# Altium PCB PCB1.PcbDoc
Units mm, origin at the board's own origin, x right, y up, seen from the top; angles counter-clockwise.
Board outline 86 x 54.03 mm, 2 copper layers (Top Layer, Bottom Layer); 70 components, 64 nets, 250 pads, 287 vias.
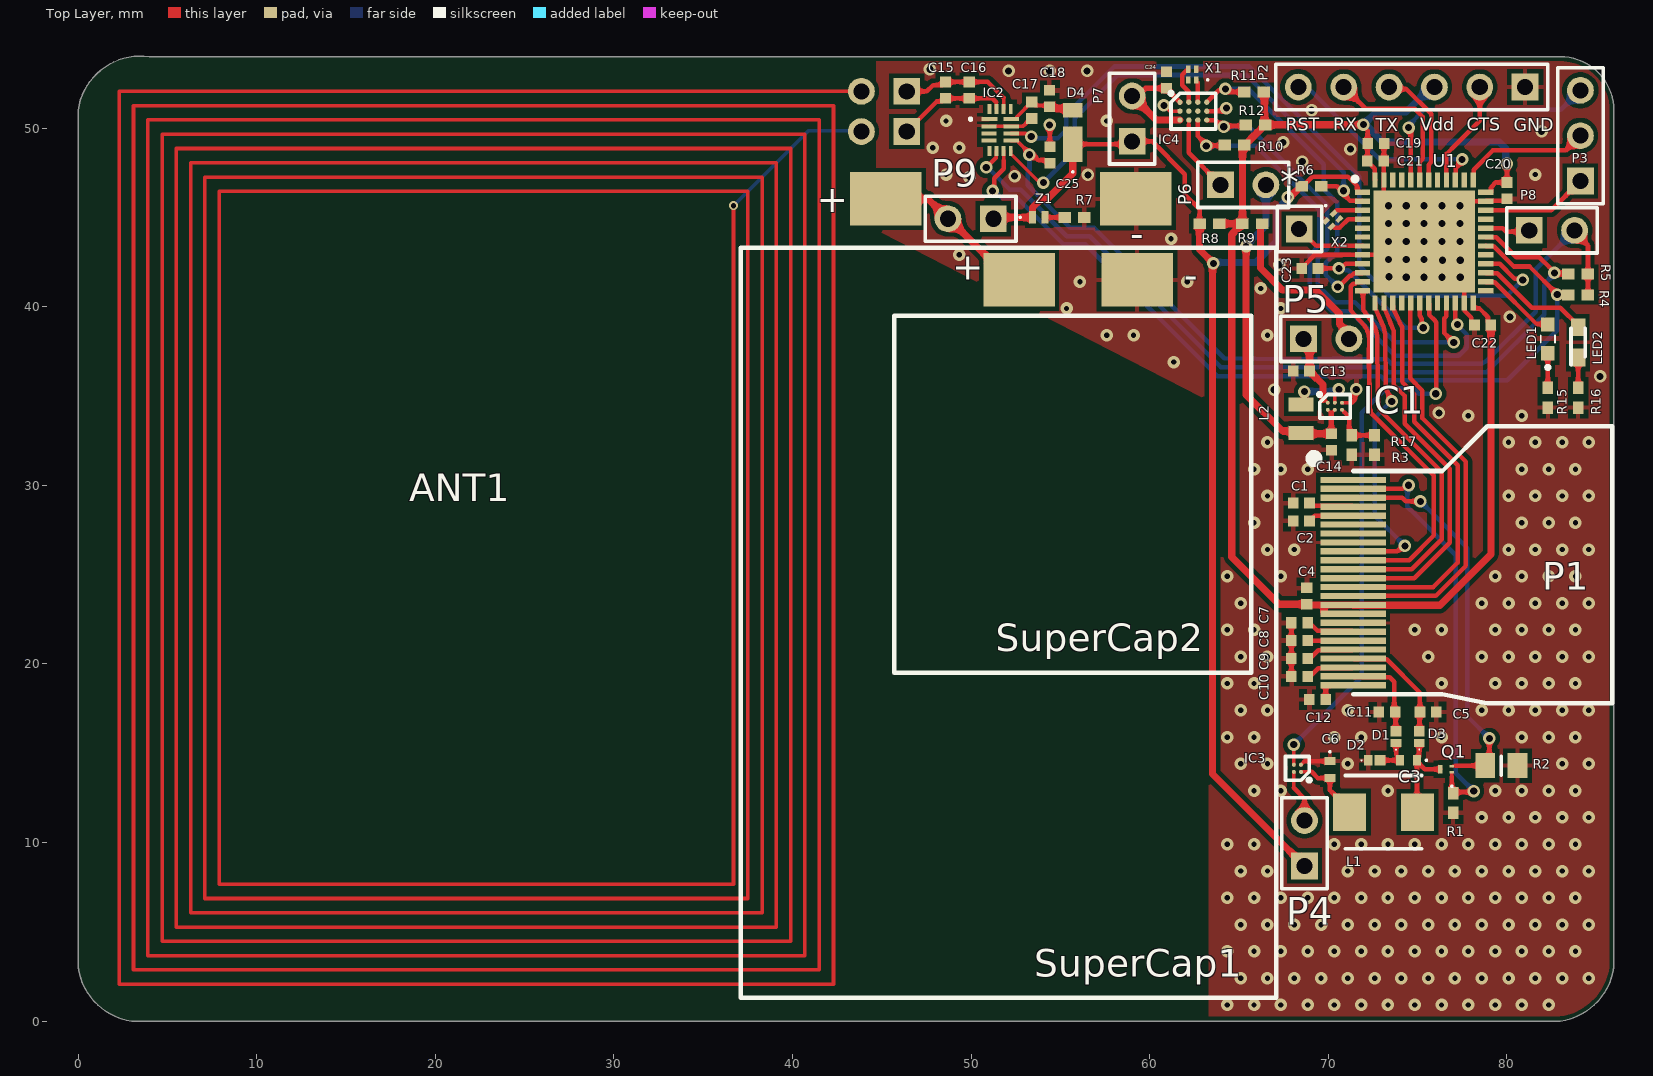
[diagram p0: Top Layer view]
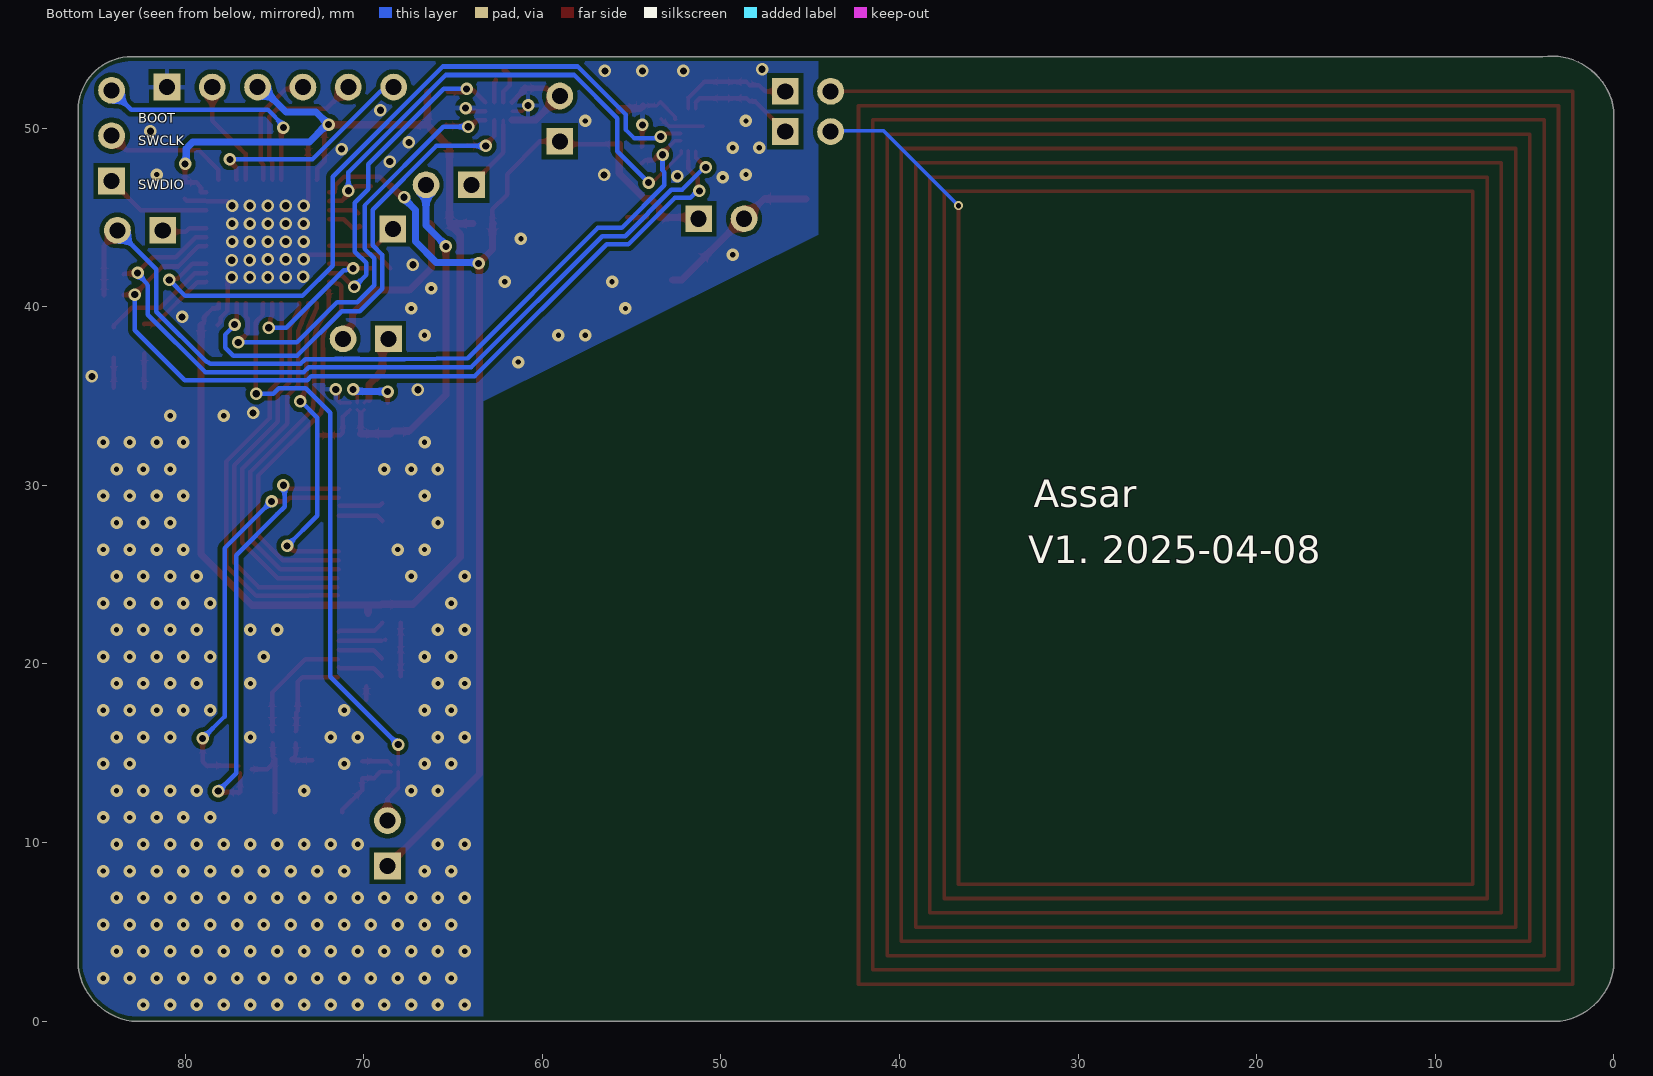
[diagram p1: Bottom Layer view, seen from below]

## Layer stack, top to bottom
Top Solder: solder mask 0.0102, Solder Resist, Dk 3.5
Top Layer: signal copper 0.0356
Dielectric 1: dielectric 0.32, FR-4, Dk 4.8
Bottom Layer: signal copper 0.0356
Bottom Solder: solder mask 0.0102, Solder Resist, Dk 3.5

## Board outline
0,3 ccw(c3.5,3.5) 3,0 83,0 ccw(c82.5,3.5) 86,3 86,51 ccw(c83,51) 83,54 4,54 ccw(c3.5,50.5) 0,51

## Design rules (kind name [scope] priority, off if disabled: settings)
BoardOutlineClearance [All] p1: gap=0.25 ignorepadtopadclearanceinfootprint=FALSE
Clearance "Stitching Vref-" [IsStitchingVia and InNet('Vref-') vs (IsVia and (Not IsStitchingVia)) Or IsPad] p1: gap=0.127 ignorepadtopadclearanceinfootprint=FALSE
Clearance [All] p2: gap=0.254 ignorepadtopadclearanceinfootprint=TRUE except(0: Arc-Hole Track-Hole SMDPad-Hole THPad-Hole Via-Hole Fill-Hole Poly-Hole Region-Hole Text-Hole; 0.1: Arc-SMDPad Track-SMDPad; 0.2: Arc-Arc Arc-Track Track-Track SMDPad-SMDPad)
ComponentClearance [All] p1: gap=0 collisioncheckmode=3 verticalgap=0 showdistances=FALSE
MinimumSolderMaskSliver [All] p1: minsoldermaskwidth=0.1
PolygonConnect [All] p1: connectstyle=Relief reliefconductorwidth=0.254 reliefentries=4 polygonreliefangle="90 Angle" airgapwidth=0.254
RoutingVias [All] p1: holewidth=0.711 width=1.27 viastyle="Through Hole" minholewidth=0.3 minwidth=0.6 maxholewidth=0.711 maxwidth=1.27
SilkToSolderMaskClearance [IsPad] p1: minsilkscreentomaskgap=0.15 clearancetoexposedcopper=TRUE
SolderMaskExpansion [All] p1: expansion=0.102 istentingtop=FALSE
Width [All] p1: maxlimit=5 minlimit=0.2 preferedwidth=0.254 minimp=50.000000 maximp=50.000000 favimp=50.000000
27 further rules are at their usual default settings.

## Classes and differential pairs
component class DisplayDrivare: C1 C2 C3 C4 C5 C6 C7 C8 C9 C10 C11 C12 C13 C14 C24 D1 D2 D3 IC1 IC3 IC4 L1 L2 P1 P4 P5 P6 P7 P9 Q1 R1 R2 R3 R10 R11 R12 R17 SuperCap1 SuperCap2 X1
component class DigitalBlad: ANT1 C15 C16 C17 C18 C19 C20 C21 C22 C23 C25 D4 IC2 LED1 LED2 P2 P3 P8 R4 R5 R6 R7 R8 R9 R15 R16 U1 X2 Z1

## Components (designator, comment, footprint, x,y, rotation, side; value= is the part's Value field where it differs from the comment)
* "testpointu desu" Testupoint 67.056,42.981 r0 top
ANT1 "NFC-antenna" Antenna1 2.1,1.86 r0 top locked
C1 "GRM155R61E105KA12D" CAPC1005X55N 68.5,29 r180 top value=1µF
C2 "GRM155R61E105KA12D" CAPC1005X55N 68.5,28 r180 top value=1µF
C3 "GRM155C61E475ME15J" GRM15x 74.5,14.6 r180 top value=4.7µF
C4 "GRM155R61E105KA12D" CAPC1005X55N 68.8,23.8 r90 top value=1µF
C5 "GRM155R61E105KA12D" CAPC1005X55N 75.6,17.3 r180 top value=1µF
C6 "GRM155C61E475ME15J" GRM15x 70.1,14.075 r270 top value=4.7µF
C7 "GRM155R61E105KA12D" CAPC1005X55N 68.4,22.3 r180 top value=1µF
C8 "GRM155R61E105KA12D" CAPC1005X55N 68.4,21.3 r180 top value=1µF
C9 "GRM155R61E105KA12D" CAPC1005X55N 68.4,20.3 r180 top value=1µF
C10 "GRM155R61E105KA12D" CAPC1005X55N 68.4,19.3 r180 top value=1µF
C11 "GRM155R61E105KA12D" CAPC1005X55N 73.3,17.3 r180 top value=1µF
C12 "GRM155R61E105KA12D" CAPC1005X55N 69.4,18 r180 top value=1µF
C13 "AMK105CBJ106MV-F" CAPC1005X70N 68.5,36.4 r0 top
C14 "AMK105CBJ106MV-F" CAPC1005X70N 70.175,32.425 r90 top
C15 "GRM155C81C474KE01D" CAPC1005X70N 48.575,52.125 r90 top value=0F
C16 "GRM155C81C474KE01D" CAPC1005X70N 49.9,52.125 r90 top value=0F
C17 "C0402C101KCGACAUTO" CAPC1005X70N 53.4,51 r90 top
C18 "C0402C101KCMBASJ105SB7474KFNA01GACAUTO" CAPC1005X70N 54.4,51.66 r270 top
C19 "C0402C475K8PACTU" CAPC1005X70N 72.675,49.15 r0 top
C20 "MLAST105SB5104KFNA01" CAPC1005X70N 80.025,46.5 r270 top
C21 "MLAST105SB5104KFNA01" CAPC1005X70N 72.65,48.15 r0 top
C22 "MLAST105SB5104KFNA01" CAPC1005X70N 78.65,38.975 r180 top
C23 "VJ0402Y103KXJAC31X" CAPC1005X70N 68.975,42.15 r180 top
C24 "MLAST105SB5104KFNA01" CAPC1005X70N 60.95,52.69 r90 top
C25 "GRM155R61E105KA12D" CAPC1005X55N 54.425,48.5 r90 top value=1µF
D1 "NSR05F30NXT5G" NSR05F30NXT5G 73.8,15.9 r90 top
D2 "NSR05F30NXT5G" NSR05F30NXT5G 72.567,14.6 r0 top
D3 "NSR05F30NXT5G" NSR05F30NXT5G 75.1,15.9 r90 top
D4 "RBE01VYM6AFHTR" RBE01VYM6AFHTR 55.7,49.75 r0 top
IC1 "MAX17220ENT+T" BGA6C40P3X2_142X89X50 70.375,34.425 r0 top
IC2 "NTP53321G0JHKZ" NTP53321G0JHKZ 51.625,49.9 r0 top
IC3 "TPS22916CYFPR" BGA4C40P2X2_78X78X50 68.275,14.15 r180 top
IC4 "MAX31334EWC+T" BGA12C50P4X3_197X147X69 62.45,50.95 r0 top
L1 "SRP0408F-100M" INDPM4341X80N 73.1,11.7 r0 top
L2 "74479774222" WE-PMI_080562 68.475,33.725 r90 top
LED1 "150060RS55040" 150060RS55040 82.3,38.2 r90 top
LED2 "150060VS55040" LEDM168X50N 84,38 r90 top
P1 "FPC24(0.5MM)" "FPC24 (0.5mm)" 71.4,18.8 r0 top locked
P2 "FTDI" HDR1X6 81.03,52.3 r180 top
P3 "Header 3" HDR1X3 84.125,47.035 r90 top
P4 "Header 2" HDR1X2 68.675,8.685 r90 top
P5 "Header 2" HDR1X2 68.625,38.2 r0 top
P6 "Header 2" HDR1X2 63.975,46.825 r0 top
P7 "Header 2" HDR1X2 59.025,49.26 r90 top
P8 "Header 2" HDR1X2 81.26,44.275 r0 top
P9 "Header 2" HDR1X2 51.25,44.925 r180 top
Q1 "CSD17381F4" CSD17381F4 76.6,14.1 r180 top
R1 "CRCW040210K0FKEDHP" RESC1005X40N 77,12.2 r90 top
R2 "ERJ-U6QJR47V" RESC2012X65N 79.7,14.3 r180 top
R3 "CRT0402-BY-80R6GLF" RESC1005X40N 71.325,32.25 r90 top
R4 "CRCW04024K70FKEDHP" RESC1005X40N 84,40.65 r0 top
R5 "CRCW04024K70FKEDHP" RESC1005X40N 84,41.825 r0 top
R6 "CRCW04024K70FKEDHP" RESC1005X40N 69.075,46.75 r180 top
R7 "SFR01MZPJ470" RESC1005X40N 55.8,45 r0 top
R8 "Generic component" RESC1005X40N 63.35,44.65 r180 top
R9 "Generic component" RESC1005X40N 65.75,44.65 r180 top
R10 "CRCW04024K70FKEDHP" RESC1005X40N 64.75,49.05 r0 top
R11 "CRCW04024K70FKEDHP" RESC1005X40N 65.85,52.025 r180 top
R12 "CRCW04024K70FKEDHP" RESC1005X40N 65.925,50.175 r0 top
R15 "SFR01MZPJ470" RESC1005X40N 82.3,34.9 r90 top
R16 "SFR01MZPJ470" RESC1005X40N 84,34.9 r90 top
R17 "CRT0402-BY-80R6GLF" RESC1005X40N 72.6,32.25 r90 top
SuperCap1 "S-Power 2S" "S-Power 2S" 52.1,43.3 r0 top locked
SuperCap2 "S-Power 2R" "S-Power 2R" 55.7,39.5 r0 top locked
U1 "STM32L431CCU6" QFN50P700X700X60-49N-D 75.375,43.65 r0 top locked
X1 "WMRAG32K76CS2C00R0" WMRAG32K76CS2C00R0 62.4,53 r90 top
X2 "WMRAG32K76CS2C00R0" WMRAG32K76CS2C00R0 70.25,44.85 r225 top
Z1 "BZT52C2V7LP-7" BZT52C2V7LP7 53.8,45 r0 top

## Footprints (in the part's own frame and the unit in brackets; to place one, negate y for a bottom-side part, rotate by r counter-clockwise, add the part's x,y. Pads: shape width x height; smd on the part's side, far side on the other; paste and mask are expansions set on the pad)
150060RS55040 [mm]
  rect 0.8x0.75 smd: 1(-0.8,0) 2(0.8,0)
  silkscreen extent -1.7,-0.4 0.2,0.4, body extent -0.79,-0.4 0.81,0.4, height 0.4
Antenna1 [mm]
  rect 1.5x1.5 hole 0.9: 0(44.3,50.2) 1(44.3,47.947)
  round 1.5 hole 0.9: ""(41.76,50.2) ""(41.76,47.947)
  Top Layer lines w0.2: 1.8,1.8 38.6,1.8 38.6,47.8 2.6,47.8 2.6,2.6 37.8,2.6 37.8,47 3.4,47 3.4,3.4 37,3.4 37,46.2 4.2,46.2 4.2,4.2 36.2,4.2 36.2,45.4 5,45.4 5,5 35.4,5 35.4,44.6 5.8,44.6 5.8,5.8 34.6,5.8 34.6,43.8 ; 1.8,1.814 1.8,48.6 39.4,48.6 39.4,1 1,1 1,49.393 40.2,49.393 40.2,0.2 0.2,0.2 0.2,50.2 41.76,50.2
  Bottom Layer lines w0.2: 34.6,43.8 38.8,48 41.76,48
BGA4C40P2X2_78X78X50 [mm]
  round 0.226 smd: A1(-0.2,0.2) A2(0.2,0.2) B1(-0.2,-0.2) B2(0.2,-0.2)
  silkscreen extent -0.76,-0.66 0.66,0.76, body extent -0.39,-0.39 0.39,0.39, height 0.5
BGA6C40P3X2_142X89X50 [mm]
  round 0.216 smd: A1(-0.4,0.2) A2(0,0.2) A3(0.4,0.2) B1(-0.4,-0.2) B2(0,-0.2) B3(0.4,-0.2)
  silkscreen extent -0.96,-0.66 0.86,0.76, body extent -0.71,-0.44 0.71,0.44, height 0.5
BGA12C50P4X3_197X147X69 [mm]
  round 0.298 smd: A1(-0.75,0.5) A2(-0.25,0.5) A3(0.25,0.5) A4(0.75,0.5) B1(-0.75,0) B2(-0.25,0) B3(0.25,0) B4(0.75,0) C1(-0.75,-0.5) C2(-0.25,-0.5) C3(0.25,-0.5) C4(0.75,-0.5)
  silkscreen extent -1.35,-1 1.25,1.1, body extent -0.98,-0.73 0.98,0.73, height 0.69
BZT52C2V7LP7 [mm]
  rect 0.4x0.7 smd: 1(-0.35,0) 2(0.35,0)
  silkscreen extent -1.1,-0.05 -1,0.05
CAPC1005X55N [mm]
  rect 0.6x0.62 smd: 1(-0.46,0) 2(0.46,0)
  body extent -0.5,-0.25 0.5,0.25, height 0.25
CAPC1005X70N [mm]
  rect 0.6x0.62 smd: 1(-0.46,0) 2(0.46,0)
  body extent -0.5,-0.25 0.5,0.25, height 0.5
CSD17381F4 [mm]
  rect 0.25x0.15 smd: 1(-0.325,0.175) 2(-0.325,-0.175)
  rect 0.25x0.5 smd: 3(0.325,0)
  silkscreen extent -0.37,0.9 -0.28,1, body extent -0.5,-0.3 0.5,0.3, height 0.35
"FPC24 (0.5mm)" [mm]
  rect 3.67x0.35 smd: 1(0,11.5) 2(0,11) 3(0,10.5) 4(0,10) 5(0,9.5) 6(0,9) 7(0,8.5) 8(0,8) 9(0,7.5) 10(0,7) 11(0,6.5) 12(0,6) 13(0,5.5) 14(0,5) 15(0,4.5) 16(0,4) 17(0,3.5) 18(0,3) 19(0,2.5) 20(0,2) 21(0,1.5) 22(0,1) 23(0,0.5) 24(0,0)
  silkscreen extent -2.42,-1 14.5,14.5
GRM15x [mm]
  rect 0.45x0.6 smd: 1(-0.475,0) 2(0.475,0)
  silkscreen extent -1.05,-0.05 -0.95,0.05, body extent -0.5,-0.28 0.5,0.27, height 0.5
HDR1X2 [mm] "Connector; Header; 2 Position"
  rect 1.5x1.5 hole 0.9: 1(0,0)
  round 1.5 hole 0.9: 2(2.54,0)
  silkscreen extent -1.27,-1.27 3.81,1.27
HDR1X3 [mm] "Connector; Header; 3 Position"
  rect 1.5x1.5 hole 0.9: 1(0,0)
  round 1.5 hole 0.9: 2(2.54,0) 3(5.08,0)
  silkscreen extent -1.27,-1.27 6.35,1.27
HDR1X6 [mm] "Connector; Header; 6 Position"
  rect 1.5x1.5 hole 0.9: 1(0,0)
  round 1.5 hole 0.9: 2(2.54,0) 3(5.08,0) 4(7.62,0) 5(10.16,0) 6(12.7,0)
  silkscreen extent -1.27,-1.27 13.97,1.27
INDPM4341X80N [mm]
  rect 1.85x2.1 smd: 1(-1.9,0) 2(1.9,0)
  silkscreen extent -2.15,-2.05 2.15,2.05, body extent -2.15,-2.05 2.15,2.05, height 0.8
LEDM168X50N [mm]
  rect 1x0.8 smd: 1(-0.85,0) 2(0.85,0)
  silkscreen extent -1.25,-0.4 0.8,0.4, body extent -0.8,-0.4 0.8,0.4, height 0.4
NSR05F30NXT5G [mm]
  rect 0.47x0.6 smd: 1(-0.333,0)
  rect 0.6x0.6 smd: 2(0.333,0)
  silkscreen extent -0.71,0 -0.7,0, body extent -0.47,-0.3 0.53,0.3, height 0.31
NTP53321G0JHKZ [mm]
  rect 0.9x0.22 smd: 1(-0.6,0.6)
  rect 0.85x0.22 smd: 2(-0.625,0.2) 3(-0.625,-0.2) 4(-0.625,-0.6) 9(0.625,-0.6) 10(0.625,-0.2) 11(0.625,0.2) 12(0.625,0.6)
  rect 0.22x0.55 smd: 5(-0.6,-1.175) 6(-0.2,-1.175) 7(0.2,-1.175) 8(0.6,-1.175) 13(0.6,1.175) 14(0.2,1.175) 15(-0.2,1.175) 16(-0.6,1.175)
  silkscreen extent -1.7,0.55 -1.6,0.65, body extent -0.9,-1.3 0.9,1.3, height 0.6
QFN50P700X700X60-49N-D [mm]
  rect 0.85x0.3 smd: 1(-3.45,2.75) 2(-3.45,2.25) 3(-3.45,1.75) 4(-3.45,1.25) 5(-3.45,0.75) 6(-3.45,0.25) 7(-3.45,-0.25) 8(-3.45,-0.75) 9(-3.45,-1.25) 10(-3.45,-1.75) 11(-3.45,-2.25) 12(-3.45,-2.75) 25(3.45,-2.75) 26(3.45,-2.25) 27(3.45,-1.75) 28(3.45,-1.25) 29(3.45,-0.75) 30(3.45,-0.25) 31(3.45,0.25) 32(3.45,0.75) 33(3.45,1.25) 34(3.45,1.75) 35(3.45,2.25) 36(3.45,2.75)
  rect 0.3x0.85 smd: 13(-2.75,-3.45) 14(-2.25,-3.45) 15(-1.75,-3.45) 16(-1.25,-3.45) 17(-0.75,-3.45) 18(-0.25,-3.45) 19(0.25,-3.45) 20(0.75,-3.45) 21(1.25,-3.45) 22(1.75,-3.45) 23(2.25,-3.45) 24(2.75,-3.45) 37(2.75,3.45) 38(2.25,3.45) 39(1.75,3.45) 40(1.25,3.45) 41(0.75,3.45) 42(0.25,3.45) 43(-0.25,3.45) 44(-0.75,3.45) 45(-1.25,3.45) 46(-1.75,3.45) 47(-2.25,3.45) 48(-2.75,3.45)
  rect 5.7x5.7 smd: 49(0,0)
  silkscreen extent -4,3.38 -3.75,3.62, body extent -3.55,-3.55 3.55,3.55, height 0.6
RBE01VYM6AFHTR [mm]
  rect 1.1x2 smd: 1(0,-0.65)
  rect 1.1x0.8 smd: 2(0,1.25)
  silkscreen extent -0.05,-2.25 0.05,-2.15, body extent -0.7,-1.25 0.7,1.25, height 0.8
RESC1005X40N [mm]
  rect 0.7x0.6 smd: 1(-0.55,0) 2(0.55,0)
  body extent -0.5,-0.25 0.5,0.25, height 0.4
RESC2012X65N [mm]
  rect 1.1x1.4 smd: 1(-0.9,0) 2(0.9,0)
  silkscreen extent 0,-0.52 0,0.52, body extent -1,-0.63 1,0.63, height 0.65
"S-Power 2R" [mm]
  rect 4x3 smd: 1(-3,2) 2(3.6,2)
  silkscreen extent -10,-20 10,0
"S-Power 2S" [mm]
  rect 4x3 smd: 1(-6.87,2.739) 2(7.13,2.739)
  silkscreen extent -15,-42 15,0
Testupoint [mm]
  rect 1.5x1.5 hole 0.9: 0(1.319,1.369)
  silkscreen extent 0.1,0.1 2.59,2.64
WE-PMI_080562 [mm]
  rect 0.8x1.4 smd: 1(-0.8,0) 2(0.8,0)
  body extent -1,-0.63 1,0.63, height 0.6
WMRAG32K76CS2C00R0 [mm]
  rect 0.4x0.25 smd: 1(-0.3,-0.225) 2(0.3,-0.225) 3(0.3,0.225) 4(-0.3,0.225)
  silkscreen extent -0.35,-0.9 -0.25,-0.8, body extent -0.48,-0.33 0.48,0.33, height 0.45

## Part data
C1 C2 C4 C5 C7 C8 C9 C10 C11 C12 C25: library part CMP-001-00126-1, "Capacitor", Manufacturer_Name="Murata Electronics", Mouser Part Number=81-GRM155R61E105KA2D, Rated Voltage="25 VDC", Arrow Part Number=GRM155R61E105KA12D, Arrow Price/Stock=https://www.arrow.com/en/products/grm155r61e105ka12d/murata-manufacturing?region=nac, Datasheet Link=https://search.murata.co.jp/Ceramy/image/img/A01X/G101/ENG/GRM155R61E105KA12-01A.pdf, Design Item ID=GRM155R61E105KA12D, Height=0.55mm, Manufacturer_Part_Number=GRM155R61E105KA12D, Mouser Price/Stock=https://www.mouser.co.uk/ProductDetail/Murata-Electronics/GRM155R61E105KA12D?qs=hiffU4J9V6bE4a81t2Mv5A%3D%3D, Source=SamacSys.SchLib
C3 C6: library part CMP-001-00127-1, "Capacitor", Manufacturer_Name="Murata Electronics", Mouser Part Number=81-GRM15C61E475ME15J, Rated Voltage="25 VDC", Arrow Part Number=GRM155C61E475ME15J, Arrow Price/Stock=https://www.arrow.com/en/products/grm155c61e475me15j/murata-manufacturing?region=nac, Datasheet Link=https://search.murata.co.jp/Ceramy/image/img/A01X/G101/ENG/GRM155C61E475ME15-01A.pdf, Design Item ID=GRM155C61E475ME15J, Height=0.5mm, Manufacturer_Part_Number=GRM155C61E475ME15J, Mouser Price/Stock=https://www.mouser.co.uk/ProductDetail/Murata-Electronics/GRM155C61E475ME15J?qs=By6Nw2ByBD02p8xq06vhEQ%3D%3D, Source=SamacSys.SchLib
C13 C14: library part "Generic capacitor", "Multilayer Ceramic Capacitors MLCC - SMD/SMT 4V 10uF X5R 0402 20 %", Capacitance=10uF, ComponentLink1Description="New link", ComponentLink1URL=https://www.mouser.se/ProductDetail/TAIYO-YUDEN/AMK105CBJ106MV-F?qs=sGAEpiMZZMsh%252B1woXyUXj0Cks%252BXuBt5iPLxjTe7mki8%3D
C15 C16: library part CMP-001-00140-1, "Multilayer Ceramic Capacitors MLCC - SMD/SMT", Manufacturer_Name="Murata Electronics", Mouser Part Number=81-GRM155C81C474KE1D, Datasheet Link=https://search.murata.co.jp/Ceramy/image/img/A01X/G101/ENG/GRM155C81C474KE01-01A.pdf, Design Item ID=GRM155C81C474KE01D, Height=0.7mm, Manufacturer_Part_Number=GRM155C81C474KE01D, Mouser Price/Stock=https://www.mouser.com/Search/Refine.aspx?Keyword=81-GRM155C81C474KE1D, Source=SamacSys.SchLib
C17: library part "Generic capacitor", "Multilayer Ceramic Capacitors MLCC - SMD/SMT 500V 0.0001uF C0G 0402 10% AEC-Q200", Capacitance=100pF, ComponentLink1Description="New link", ComponentLink1URL=https://www.mouser.se/ProductDetail/KEMET/C0402C101KCGACAUTO?qs=1Kr7Jg1SGW8kQysZZQPmCw%3D%3D
C18: library part "Generic capacitor", "Multilayer Ceramic Capacitors MLCC - SMD/SMT 500V 0.0001uF C0G 0402 10% AEC-Q200", Capacitance=0.47uF, ComponentLink1Description="New link", ComponentLink1URL=https://www.mouser.se/ProductDetail/TAIYO-YUDEN/MBASJ105SB7474KFNA01?qs=tlsG%2FOw5FFh70%252Bw5vm%252Bxgg%3D%3D
C19: library part "Generic capacitor", "Multilayer Ceramic Capacitors MLCC - SMD/SMT", Capacitance=4.7uF, ComponentLink1Description="New link", ComponentLink1URL=https://www.mouser.se/ProductDetail/TAIYO-YUDEN/MLASJ105BB5475MFNA01?qs=sGAEpiMZZMsh%252B1woXyUXj3XUfju0vRpjpyIV14TsoXE%3D
C20 C21 C22 C24: library part "Generic capacitor", "Multilayer Ceramic Capacitors MLCC - SMD/SMT 25V 0.1uF X5R 0402 10% Medical", Capacitance=100nF, ComponentLink1Description="New link", ComponentLink1URL=https://www.mouser.se/ProductDetail/TAIYO-YUDEN/MLAST105SB5104KFNA01?qs=sGAEpiMZZMsh%252B1woXyUXj3XUfju0vRpjIEu19pL458I%3D
C23: library part "Generic capacitor", "Multilayer Ceramic Capacitors MLCC - SMD/SMT 0402 10nF 16volts X7R 10%", Capacitance=10nF, ComponentLink1Description="New link", ComponentLink1URL=https://www.mouser.se/ProductDetail/Vishay-Vitramon/VJ0402Y103KXJAC31X?qs=sGAEpiMZZMsh%252B1woXyUXj7JttxwcgSfbi%2FPlga%252BwiEM%3D
D1 D2 D3: library part CMP-004-00034-1, "Schottky Diode", Manufacturer_Name=onsemi, Mouser Part Number=863-NSR05F30NXT5G, Arrow Part Number=NSR05F30NXT5G, Arrow Price/Stock=https://www.arrow.com/en/products/nsr05f30nxt5g/on-semiconductor?region=nac, Datasheet Link=https://www.onsemi.com/pub/Collateral/NSR05F30.PDF, Design Item ID=NSR05F30NXT5G, Height=0.31mm, Manufacturer_Part_Number=NSR05F30NXT5G, Mouser Price/Stock=https://www.mouser.co.uk/ProductDetail/onsemi/NSR05F30NXT5G?qs=Ddzdinyxz%2FkBCezibUxhIA%3D%3D, Source=SamacSys.SchLib
D4: library part CMP-004-00062-1, "DIODE SCHOTTKY 6V 100MA TUMD2M", Manufacturer_Name="ROHM Semiconductor", Mouser Part Number=755-RBE01VYM6AFHTR, Datasheet Link=https://www.digikey.ph/en/products/detail/rohm-semiconductor/RBE01VYM6AFHTR/24634517, Design Item ID=RBE01VYM6AFHTR, Height=0.8mm, Manufacturer_Part_Number=RBE01VYM6AFHTR, Mouser Price/Stock=https://www.mouser.co.uk/ProductDetail/ROHM-Semiconductor/RBE01VYM6AFHTR?qs=VVKQmw408U8czvswzPLZtQ%3D%3D, Source=SamacSys.SchLib
IC1: library part CMP-031-00089-1, "MAXIM INTEGRATED PRODUCTS - MAX17220ENT+T - DC-DC Switching Step Up Regulator", Manufacturer_Name="Analog Devices", Mouser Part Number=700-MAX17220ENT+T, Supplier Part Number=594-MCS04020D8062BE0, Arrow Part Number=MAX17220ENT+T, Arrow Price/Stock=https://www.arrow.com/en/products/max17220entt/analog-devices?region=nac, Datasheet Link=https://www.analog.com/MAX17220/datasheet, Design Item ID=MAX17220ENT+T, Height=0.5mm, Manufacturer_Part_Number=MAX17220ENT+T, Mouser Price/Stock=https://www.mouser.co.uk/ProductDetail/Analog-Devices-Maxim-Integrated/MAX17220ENT%2bT?qs=BZBei1rCqCAO5QX%2FSv6p6w%3D%3D, Source=SamacSys.SchLib, Supplier=Mouser
IC2: library part CMP-031-00011-1, "Interface - Specialized NTAG", Manufacturer_Name=NXP, Mouser Part Number=771-NTP53321G0JHKZ, Arrow Part Number=NTP53321G0JHKZ, Arrow Price/Stock=https://www.arrow.com/en/products/ntp53321g0jhkz/nxp-semiconductors?region=nac, Datasheet Link=https://www.nxp.com/docs/en/data-sheet/NTP53x2.pdf, Design Item ID=NTP53321G0JHKZ, Height=0.5mm, Manufacturer_Part_Number=NTP53321G0JHKZ, Mouser Price/Stock=https://www.mouser.co.uk/ProductDetail/NXP-Semiconductors/NTP53321G0JHKZ?qs=u16ybLDytRYy2Rt%2Fib73Dw%3D%3D, Source=SamacSys.SchLib
IC3: library part CMP-031-00019-1, "TPS22916 5.5-V", Manufacturer_Name="Texas Instruments", Mouser Part Number=595-TPS22916CYFPR, Arrow Part Number=TPS22916CYFPR, Arrow Price/Stock=https://www.arrow.com/en/products/tps22916cyfpr/texas-instruments?utm_currency=USD&region=nac, Datasheet Link=http://www.ti.com/lit/gpn/tps22916, Design Item ID=TPS22916CYFPR, Height=0.5mm, Manufacturer_Part_Number=TPS22916CYFPR, Mouser Price/Stock=https://www.mouser.co.uk/ProductDetail/Texas-Instruments/TPS22916CYFPR?qs=EU6FO9ffTweddKR4NsfVQg%3D%3D, Source=SamacSys.SchLib
IC4: library part CMP-031-00017-1, "Ultra-Low-Power Real Time Clock with Integrated Power Switch", Manufacturer_Name="Analog Devices", Mouser Part Number=700-MAX31334EWC+T, Arrow Part Number=MAX31334EWC+T, Arrow Price/Stock=https://www.arrow.com/en/products/max31334ewct/analog-devices?region=nac, Datasheet Link=https://www.analog.com/MAX31334/datasheet, Design Item ID=MAX31334EWC+T, Height=0.69mm, Manufacturer_Part_Number=MAX31334EWC+T, Mouser Price/Stock=https://www.mouser.co.uk/ProductDetail/Analog-Devices-Maxim-Integrated/MAX31334EWC%2bT?qs=vvQtp7zwQdOckJhTSGVMeA%3D%3D, Source=SamacSys.SchLib
L1: library part CMP-006-00031-1, "Power Inductors - SMD 10 UH 20%", Rating="10uH 1A", Design Item ID=SRP0408F-100M, Source=SamacSys.SchLib
L2: library part CMP-006-00060-1, "Inductor-WE", Rating="2.2uH 700mA", Design Item ID=74479774222, Source=Schlib.SchLib
LED1: library part CMP-007-00073-1, "RED Standard LEDs - SMD WL-SMCD SMD MonoChip 0603 Red 632nm", Manufacturer_Name="Wurth Elektronik", Mouser Part Number=710-150060RS55040, Datasheet Link=http://katalog.we-online.de/led/datasheet/150060RS55040.pdf, Design Item ID=150060RS55040, Height=0mm, Manufacturer_Part_Number=150060RS55040, Mouser Price/Stock=https://www.mouser.co.uk/ProductDetail/Wurth-Elektronik/150060RS55040?qs=8Aam6%252B7C6HHnMZFlrlTntA%3D%3D, Source=SamacSys.SchLib
LED2: library part CMP-007-00074-1, "Green LED", Manufacturer_Name="Wurth Elektronik", Mouser Part Number=710-150060VS55040, Datasheet Link=https://katalog.we-online.com/led/datasheet/150060VS55040.pdf, Design Item ID=150060VS55040, Height=0.5mm, Manufacturer_Part_Number=150060VS55040, Mouser Price/Stock=https://www.mouser.co.uk/ProductDetail/Wurth-Elektronik/150060VS55040?qs=8Aam6%252B7C6HEumg%252B0cJZzvA%3D%3D, Source=SamacSys.SchLib
P1: "No Description Available", Mfr_Name="Molex Connector Corporation", RefDes=RefDes, Type=Type
P2: library part CMP-002-00359-1, "Header, 6-Pin", Component Type=Standard, Design Item ID="Header 6", LatestRevisionDate=17-Jul-2002, LatestRevisionNote="Re-released for DXP Platform.", Pins=6, Publisher="Altium Limited", Source="Miscellaneous Connectors.SchLib"
P3: library part CMP-002-00163-1, "Header, 3-Pin", Component Type=Standard, Design Item ID="Header 3", LatestRevisionDate=17-Jul-2002, LatestRevisionNote="Re-released for DXP Platform.", Pins=3, Publisher="Altium Limited", Source="Miscellaneous Connectors.SchLib"
P4 P5 P6 P7 P8 P9: library part CMP-002-00143-1, "Header, 2-Pin", Component Type=Standard, Design Item ID="Header 2", LatestRevisionDate=17-Jul-2002, LatestRevisionNote="Re-released for DXP Platform.", Pins=2, Publisher="Altium Limited", Source="Miscellaneous Connectors.SchLib"
Q1: library part CMP-102-000001-1, "MOSFET (N-Channel)", Manufacturer_Name="Texas Instruments", Mouser Part Number=595-CSD17381F4, Datasheet Link=https://www.ti.com/lit/gpn/csd17381f4?HQS=ti-null-null-sf-df-pf-sep-wwe&DCM=yes?hkey=EF798316E3902B6ED9A73243A3159BB0, Design Item ID=CSD17381F4, Height=0.36mm, Manufacturer_Part_Number=CSD17381F4, Mouser Price/Stock=https://www.mouser.co.uk/ProductDetail/Texas-Instruments/CSD17381F4?qs=aG%252B9dtamCDf9%2FrYwJezivw%3D%3D, Source=SamacSys.SchLib
R1: library part CMP-009-00221-1, "CRCW Power Resistor 0402 0.063W 10K Vishay CRCW Series Thick Film Power Resistor 0402 Case 10k +/-1% 0.125W +/-100ppm/K", Manufacturer_Name=Vishay, Mouser Part Number=71-CRCW040210K0FKEDH, Resistance=10k, Arrow Part Number=CRCW040210K0FKEDHP, Arrow Price/Stock=https://www.arrow.com/en/products/crcw040210k0fkedhp/vishay?utm_currency=USD&region=nac, Datasheet Link=http://www.vishay.com/docs/20035/dcrcwe3.pdf, Design Item ID=CRCW040210K0FKEDHP, Height=0.4mm, Manufacturer_Part_Number=CRCW040210K0FKEDHP, Mouser Price/Stock=https://www.mouser.co.uk/ProductDetail/Vishay-Dale/CRCW040210K0FKEDHP?qs=FlFvgi4rxBxmIiaeyFjrkA%3D%3D, Source=SamacSys.SchLib
R2: library part CMP-009-00220-1, "Thick Film Resistors - SMD 0805 0.25W 5% .47ohms AEC-Q200", Manufacturer_Name=Panasonic, Mouser Part Number=667-ERJ-U6QJR47V, Resistance=470m, Datasheet Link=https://industrial.panasonic.com/cdbs/www-data/pdf/RDP0000/AOA0000C334.pdf, Design Item ID=ERJ-U6QJR47V, Height=0.65mm, Manufacturer_Part_Number=ERJ-U6QJR47V, Mouser Price/Stock=https://www.mouser.co.uk/ProductDetail/Panasonic/ERJ-U6QJR47V?qs=5aG0NVq1C4wLyK2PwyO%252BIA%3D%3D, Source=SamacSys.SchLib
R3 R17: library part "Generic resistor", "Thin Film Resistors 1/16watts 80.6 ohm 0.10%", Resistance=np, ComponentLink1Description="New link", ComponentLink1URL=https://www.mouser.se/ProductDetail/Bourns/CRT0402-BY-80R6GLF?qs=sGAEpiMZZMvdGkrng054tyoJODJe%252BCGW7Yc230%2FWBYo%3D
R4 R5 R6 R10 R12: library part CMP-009-00230-1, "CRCW Power Resistor 0402 0.063W 4K7 Vishay CRCW Series Thick Film Power Resistor 0402 Case 4.7k +/-1% 0.125W +/-100ppm/K", Manufacturer_Name=Vishay, Mouser Part Number=71-CRCW04024K70FKEDH, Resistance=4.7k, Arrow Part Number=CRCW04024K70FKEDHP, Arrow Price/Stock=https://www.arrow.com/en/products/crcw04024k70fkedhp/vishay?utm_currency=USD&region=nac, Datasheet Link=http://www.vishay.com/docs/20035/dcrcwe3.pdf, Design Item ID=CRCW04024K70FKEDHP, Height=0.4mm, Manufacturer_Part_Number=CRCW04024K70FKEDHP, Mouser Price/Stock=https://www.mouser.co.uk/ProductDetail/Vishay-Dale/CRCW04024K70FKEDHP?qs=k2%2FDWSARqgH3ASlI4vM3KQ%3D%3D, Source=SamacSys.SchLib
R7: library part "Generic resistor", "Thick Film Resistors Sulfur Tolerant Chip Resistors 0402 case size", Resistance=0, ComponentLink1Description="New link"
R8 R9: library part "Generic resistor", Resistance=np, ComponentLink1Description="New link"
R11: library part "Generic resistor", "CRCW Power Resistor 0402 0.063W 4K7 Vishay CRCW Series Thick Film Power Resistor 0402 Case 4.7k +/-1% 0.125W +/-100ppm/K", Resistance=4.7k, ComponentLink1Description="New link"
R15 R16: library part "Generic resistor", "Thick Film Resistors Sulfur Tolerant Chip Resistors 0402 case size", Resistance=47, ComponentLink1Description="New link", ComponentLink1URL=https://www.mouser.se/ProductDetail/ROHM-Semiconductor/SFR01MZPJ470?qs=sGAEpiMZZMvdGkrng054t2cqbZCzJY7NKh3gUwXOa5kuN5TNJ%252Bi2TA%3D%3D
SuperCap1: library part CMP-111-000002-1, Design Item ID="S-Power 2S", Source=Schlib.SchLib
SuperCap2: library part CMP-111-000001-1, Design Item ID="S-Power 2R", Source=Schlib.SchLib
U1: library part CMP-031-00018-1, "ARM Microcontrollers - MCU 16/32-BITS MICROS", Manufacturer_Name=STMicroelectronics, Mouser Part Number=511-STM32L431CCU6, Arrow Part Number=STM32L431CCU6, Arrow Price/Stock=https://www.arrow.com/en/products/stm32l431ccu6/stmicroelectronics?region=nac, Datasheet Link=http://www.st.com/content/ccc/resource/technical/document/datasheet/group3/83/b3/60/f6/b1/cc/47/7e/DM00257211/files/DM00257211.pdf/jcr:content/translations/en.DM00257211.pdf, Design Item ID=STM32L431CCU6, Height=0.6mm, Manufacturer_Part_Number=STM32L431CCU6, Mouser Price/Stock=https://www.mouser.co.uk/ProductDetail/STMicroelectronics/STM32L431CCU6?qs=U58vgkJzipRWiXTJcDrRbg%3D%3D, Source=SamacSys.SchLib
X1 X2: library part CMP-003-00031-1, "32.768 kHz +/-20ppm Crystal 8pF 75 kOhms 4-SMD", Manufacturer_Name="Murata Electronics", Mouser Part Number=81-WMRAG32K76CS2C00R, Datasheet Link=https://www.murata.com/products/productdata/8804604674078/SPEC-WMRAG32K76CS2C00R0.pdf, Design Item ID=WMRAG32K76CS2C00R0, Height=0.35mm, Manufacturer_Part_Number=WMRAG32K76CS2C00R0, Mouser Price/Stock=https://www.mouser.co.uk/ProductDetail/Murata-Electronics/WMRAG32K76CS2C00R0?qs=bZr6mbWTK5kWV2uyypDEfg%3D%3D, Source=SamacSys.SchLib
Z1: library part CMP-004-00065-1, "Zener Diode 2.7 V 250 mW +/-7% Surface Mount DFN1006-2", Manufacturer_Name="Diodes Incorporated", Mouser Part Number=621-BZT52C2V7LP-7, Arrow Part Number=BZT52C2V7LP-7, Arrow Price/Stock=https://www.arrow.com/en/products/bzt52c2v7lp-7/diodes-incorporated?utm_currency=USD&region=nac, Datasheet Link=https://www.diodes.com/assets/Datasheets/BZT52C2V4LP-BZT52C39LP.pdf, Design Item ID=BZT52C2V7LP-7, Height=0.53mm, Manufacturer_Part_Number=BZT52C2V7LP-7, Mouser Price/Stock=https://www.mouser.co.uk/ProductDetail/Diodes-Incorporated/BZT52C2V7LP-7?qs=DwnLFiA34IIEhdzEy1XKTQ%3D%3D, Source=SamacSys.SchLib

## Via types
v1: diameter 0.7, hole 0.3, Top Layer to Bottom Layer, tented both sides, 207 vias
v2: diameter 0.7, hole 0.4, Top Layer to Bottom Layer, tented both sides, 79 vias
v3: diameter 0.5, hole 0.3, Top Layer to Bottom Layer, 1 vias

## Nets (pads, with @x,y where several pads share a name; then routed paths per layer and width w, separated by ;. In a path a pad name is that pad's centre, name@x,y a point inside that pad or via, vN(x,y) a via of type N, cw(c..) or ccw(c..) an arc to the next point about the centre after c; other vN are vias at no path point)
3V: P5.2 R9.1 | length 9.6
  Top Layer w0.4: R9.1 66.208,44.558 66.208,42.167 67.45,40.925 69.325,40.925 70.625,39.625 70.625,39.038 71.165,38.498 P5.2
A_en: C23.1 U1.9 U1.18 | length 10.1
  Top Layer w0.254: C23.1@69.436,42.149 v2(70.602,42.148) ; v2(70.602,42.148) 70.722,42.148 70.974,42.4 U1.9 ; U1.18 75.125,39.49 75.183,39.433 75.183,39.378 75.237,39.324 75.237,38.91 v2(75.322,38.825)
  Bottom Layer w0.254: v2(70.602,42.148) 70.687,42.063 70.96,42.063 70.973,42.05 71.125,42.05 74.35,38.825 v2(75.322,38.825)
alarmA: IC4.A4 R11.2 U1.10 | length 19.2
  Top Layer w0.254: IC4.A4 63.865,52.115 64.189,52.115 64.274,52.2 64.449,52.025 R11.2 ; v2(70.54,41.11) 70.596,41.11 71.218,41.731 71.309,41.731 71.455,41.877 71.902,41.877 U1.10
  Bottom Layer w0.254: v2(64.25,52.2) 65.525,52.2 69.75,47.975 69.75,46.567 70.504,45.813 70.504,43.085 69.871,42.451 69.871,41.779 v2(70.54,41.11)
ANT+: ANT1.0 C15.2 C16.2 IC2.14 | length 6.6
  Top Layer w0.2: IC2.14@51.835,51.085 51.835,51.69
  Top Layer w0.254: ANT1.0 47.532,52.06 47.884,52.412 48.403,52.412 C15.2 C16.2 50.94,52.585 51.835,51.69
ANT-: ANT1.1 C15.1 C16.1 IC2.15 | length 6.2
  Top Layer w0.2: IC2.15 51.425,51.4
  Top Layer w0.254: ANT1.1 48.085,51.492 48.402,51.492 C15.1 C16.1 51.197,51.665 51.408,51.454
BOOT0: P3.3 U1.44 | length 13.5
  Top Layer w0.254: v2(74.5,50.029) 74.5,49.908 74.625,49.783 U1.44
  Bottom Layer w0.254: v2(74.5,50.029) 74.5,50.15 75.37,51.02 83.03,51.02 P3.3
BUSY: P1.9 U1.13 | length 17.9
  Top Layer w0.254: P1.9 73.879,26.3 74.179,26.6 v2(74.3,26.6) ; U1.13 72.648,39.902 72.996,39.098 cw(c71.165,38.2) 73.144,38.692 73.203,38.455 73.229,35.432 v2(73.561,34.698)
  Bottom Layer w0.254: v2(73.561,34.698) 73.518,34.698 72.6,33.78 72.6,28.3 v2(74.3,26.6)
CS: P1.12 U1.14 | length 20.9
  Top Layer w0.254: P1.12@71.494,24.802 74.82,24.802 76.808,26.79 76.808,30.933 74.292,33.449 74.292,35.001 73.683,35.61 73.683,38.512 73.683,38.617 ; U1.14 73.148,39.902 73.455,39.184 ; 73.456,39.182 cw(c71.165,38.2) 73.481,39.122 73.683,38.618
D/C: P1.11 U1.12 | length 21.3
  Top Layer w0.254: P1.11 P1.11 74.678,25.302 76.354,26.978 76.354,30.745 72.849,34.249 72.849,34.36 72.847,34.392 72.835,34.489 72.777,35.242 72.775,35.332 72.75,38.266 72.745,38.332 ccw(c71.165,38.2) 72.409,39.182 71.954,39.846 71.954,40.877 71.931,40.9 U1.12
Disp_ON: IC3.B2 U1.19 | length 31.4
  Top Layer w0.2: IC3.B2 v2(68.075,15.475)
  Top Layer w0.254: U1.19 75.648,40.177 75.648,39.676 75.648,39.555 75.999,39.204 75.999,39.182 76.053,39.128 76.053,35.153 v2(76.025,35.125)
  Bottom Layer w0.254: v2(68.075,15.475) 71.879,19.279 71.879,34.054 73.259,35.434 74.771,35.434 75.08,35.125 v2(76.025,35.125)
ED: IC2.8 R6.1 U1.2 | length 29.1
  Top Layer w0.2: IC2.8 52.225,48.56 53.739,47.046 53.954,47.046 v2(54.05,46.95)
  Top Layer w0.254: R6.1 70.48,46.75 v2@70.816,46.414 ; v2(70.861,46.49) 70.816,46.445 v2@70.816,46.414 ; U1.2 71.902,45.923 71.223,45.923 70.816,46.329 v2@70.816,46.414
  Bottom Layer w0.254: v2(54.05,46.95) 55.8,48.7 55.8,50.55 58.225,52.975 65.413,52.975 70.861,47.527 v2(70.861,46.49)
EH: C17.2 C18.2 D4.2 IC2.12 | length 3.8
  Top Layer w0.2: IC2.12@52.535,50.504 52.569,50.504 52.575,50.51 52.575,50.645 C17.2@53.39,51.46 ; C17.2 53.6,51.26 54.34,51.26 C18.2@54.358,51.242
  Top Layer w0.254: C17.2@53.39,51.46 C17.2
  Top Layer w0.4: C18.2@54.358,51.242 C18.2 54.5,51.1 55.6,51.1 D4.2
GDR: P1.2 Q1.1 R1.2 | length 24.3
  Top Layer w0.154: 76.925,13.675 Q1.1
  Top Layer w0.254: P1.2 74.179,29.8 74.379,30 v2(74.5,30) ; 76.925,13.675 76.925,12.825 R1.2 77.063,12.813 78.088,12.813 v2(78.15,12.875)
  Bottom Layer w0.254: v2(74.5,30) 74.438,29.938 74.438,28.797 74.866,28.369 77.15,26.085 77.15,13.875 v2(78.15,12.875)
GND: C1.2 C2.2 C4.2 C5.1 C6.1 C7.2 C8.2 C9.2 C10.2 C11.2 C12.2 C13.1 C14.1 C17.1 C18.1 C19.2 C20.2 C21.2 C22.2 C23.2 C24.2 C25.2 D2.1 IC1.A3 IC2.1 IC2.2 IC2.11 IC3.B1 IC4.B1 IC4.B4 P1.8 P1.17 P2.1 R1.1 R2.1 R3.1 R7.2 R15.1 R16.1 R17.1 SuperCap1.2 SuperCap2.2 U1.8 U1.23 U1.35 U1.47 U1.49 X1.2 X2.2 | length 25.4
  Top Layer w0.2: IC2.2 52.919,50.1 53.159,50.34 53.19,50.34 53.354,50.504 C17.1@53.354,50.536 ; v2(60.805,51.268) 61.123,50.95 IC4.B1 ; IC3.B1 68.675,14.55 ; IC1.A3 71.325,34.625
  Top Layer w0.254: v2(54.4,50.175) 54.412,50.163 54.412,48.972 C25.2 ; IC4.B4 64.004,50.95 64.179,51.125 v2(64.3,51.125) ; C10.2 C9.2 C8.2 C7.2 ; C23.2 68.688,42.323 68.688,42.334 69.254,42.9 U1.8 U1.49@73.125,42.9 ; 68.675,14.55 C6.1 ; 71.325,34.625 71.489,34.789 71.489,35.284 v2(71.575,35.369) ; U1.49@73.125,45.9 U1.47 73.118,47.108 73.118,48.142 C21.2 73.123,48.162 73.123,49.138 C19.2 ; U1.49@77.625,41.4 U1.23 77.648,40.177 77.648,39.76 78.017,39.391 78.017,39.148 C22.2 ; U1.49@77.625,45.9 U1.35 78.848,45.923 79.908,45.923 C20.2
  other v1: 64.35,0.9 65.85,0.9 67.35,0.9 68.85,0.9 70.35,0.9 71.85,0.9 73.35,0.9 74.85,0.9 76.35,0.9 77.85,0.9 79.35,0.9 80.85,0.9 82.35,0.9 65.1,2.4 66.6,2.4 68.1,2.4 69.6,2.4 71.1,2.4 72.6,2.4 74.1,2.4 75.6,2.4 77.1,2.4 78.6,2.4 80.1,2.4 81.6,2.4 83.1,2.4 84.6,2.4 64.35,3.9 65.85,3.9 67.35,3.9 68.85,3.9 70.35,3.9 71.85,3.9 73.35,3.9 74.85,3.9 76.35,3.9 77.85,3.9 79.35,3.9 80.85,3.9 82.35,3.9 83.85,3.9 65.1,5.4 66.6,5.4 68.1,5.4 69.6,5.4 71.1,5.4 72.6,5.4 74.1,5.4 75.6,5.4 77.1,5.4 78.6,5.4 80.1,5.4 81.6,5.4 83.1,5.4 84.6,5.4 64.35,6.9 65.85,6.9 67.35,6.9 68.85,6.9 70.35,6.9 71.85,6.9 73.35,6.9 74.85,6.9 76.35,6.9 77.85,6.9 79.35,6.9 80.85,6.9 82.35,6.9 83.85,6.9 65.1,8.4 66.6,8.4 71.1,8.4 72.6,8.4 74.1,8.4 75.6,8.4 77.1,8.4 78.6,8.4 80.1,8.4 81.6,8.4 83.1,8.4 84.6,8.4 64.35,9.9 65.85,9.9 70.35,9.9 71.85,9.9 73.35,9.9 74.85,9.9 76.35,9.9 77.85,9.9 79.35,9.9 80.85,9.9 82.35,9.9 83.85,9.9 78.6,11.4 80.1,11.4 81.6,11.4 83.1,11.4 84.6,11.4 65.85,12.9 67.35,12.9 73.35,12.9 79.35,12.9 80.85,12.9 82.35,12.9 83.85,12.9 65.1,14.4 66.6,14.4 71.1,14.4 83.1,14.4 84.6,14.4 64.35,15.9 65.85,15.9 70.35,15.9 71.85,15.9 76.35,15.9 80.85,15.9 82.35,15.9 83.85,15.9 65.1,17.4 66.6,17.4 71.1,17.4 78.6,17.4 80.1,17.4 81.6,17.4 83.1,17.4 84.6,17.4 64.35,18.9 65.85,18.9 76.35,18.9 79.35,18.9 80.85,18.9 82.35,18.9 83.85,18.9 65.1,20.4 66.6,20.4 75.6,20.4 78.6,20.4 80.1,20.4 81.6,20.4 83.1,20.4 84.6,20.4 64.35,21.9 65.85,21.9 74.85,21.9 76.35,21.9 79.35,21.9 80.85,21.9 82.35,21.9 83.85,21.9 65.1,23.4 78.6,23.4 80.1,23.4 81.6,23.4 83.1,23.4 84.6,23.4 64.35,24.9 67.35,24.9 79.35,24.9 80.85,24.9 82.35,24.9 83.85,24.9 66.6,26.4 68.1,26.4 80.1,26.4 81.6,26.4 83.1,26.4 84.6,26.4 65.85,27.9 80.85,27.9 82.35,27.9 83.85,27.9 66.6,29.4 80.1,29.4 81.6,29.4 83.1,29.4 84.6,29.4 65.85,30.9 67.35,30.9 68.85,30.9 80.85,30.9 82.35,30.9 83.85,30.9 66.6,32.4 80.1,32.4 81.6,32.4 83.1,32.4 84.6,32.4 77.85,33.9 80.85,33.9 61.35,36.9 57.6,38.4 59.1,38.4 66.6,38.4 55.35,39.9 67.35,39.9 66.219,41.019 56.1,41.4 62.1,41.4 49.35,42.9 61.2,43.8 49.897,47.236 48.6,47.4 81.6,47.4 47.85,48.9 49.35,48.9 48.6,50.4 57.6,50.4
  other v2: 76.2,34.05 66.975,35.35 85.225,36.1 80.175,39.425 74.375,41.65 75.375,41.65 76.375,41.65 77.4,41.65 73.399,41.674 67.25,42.35 76.4,42.6 77.4,42.6 73.375,42.65 74.375,42.65 75.375,42.65 73.375,43.65 74.375,43.65 75.375,43.65 76.375,43.65 77.375,43.65 73.375,44.65 74.375,44.65 75.375,44.65 76.375,44.65 77.375,44.65 73.375,45.65 74.375,45.65 75.375,45.65 76.375,45.65 77.375,45.65 52.442,47.317 56.55,47.375 68.55,48.125 71.25,48.825 67.475,49.2 81.95,49.825 69.075,51 52.1,53.2 54.4,53.2 56.5,53.2 47.7,53.3
HPD: IC2.10 U1.28 | length 41.9
  Top Layer w0.2: IC2.10 53.065,49.7 53.24,49.525 v2(53.375,49.525)
  Top Layer w0.254: U1.28 79.6,42.4 80.437,41.563 v2@80.831,41.563
  Bottom Layer w0.254: v2(53.375,49.525) 53.456,49.444 54.869,49.444 55.346,49.921 55.346,50.771 58.025,53.45 65.581,53.45 71.75,47.281 71.75,42.29 73.44,40.6 79.994,40.6 v2(80.894,41.5)
JTCK-SWCLK: P3.2 U1.37 | length 7.3
  Top Layer w0.254: U1.37 78.148,47.123 78.148,47.673 79.225,48.75 83.3,48.75 P3.2
JTMS-SWDIO: P3.1 U1.34 | length 6
  Top Layer w0.254: U1.34 80.346,45.4 80.352,45.406 82.168,45.406 82.174,45.4 82.49,45.4 P3.1
LED_G: LED2.2 U1.27 | length 6.5
  Top Layer w0.254: U1.27 78.848,41.877 79.465,41.877 81.392,39.95 83,39.95 84,38.95 LED2.2
LED_R: LED1.2 U1.26 | length 4.5
  Top Layer w0.254: U1.26 78.848,41.377 79.323,41.377 81.668,39.032 82.293,39.032 LED1.2@82.3,39.025
Net*_0: *.0 U1.7 | length 3.9
  Top Layer w0.254: *.0 69.325,43.4 U1.7
NetC1_1: C1.1 P1.4 | length 2.5
  Top Layer w0.254: C1.1 69.112,28.848 P1.4@71.352,28.848
NetC2_1: C2.1 P1.5 | length 2.6
  Top Layer w0.254: C2.1 68.96,28.01 69.25,28.3 P1.5
NetC3_1: C3.1 D3.1 L1.2 Q1.3 | length 5.4
  Top Layer w0.254: L1.2 74.975,11.725 C3.1@74.975,14.525 ; D3.1 75.1,14.8 74.975,14.675 C3.1 C3.1@74.975,14.525 ; Q1.3 75.4,14.1 C3.1@74.975,14.525
NetC3_2: C3.2 D1.1 D2.2 | length 2.2
  Top Layer w0.254: D2.2 C3.2 74.025,14.675 73.8,14.9 D1.1
NetC6_2: C6.2 IC3.A1 L1.1 | length 4.1
  Top Layer w0.2: IC3.A1 69.075,13.95
  Top Layer w0.254: 69.075,13.95 69.419,13.606 70.094,13.606 C6.2 70.1,12.925 71.2,11.825 L1.1
NetC7_1: C7.1 P1.18 | length 2.7
  Top Layer w0.254: C7.1@68.96,22.3 68.96,22.29 69.402,21.848 71.352,21.848 P1.18
NetC8_1: C8.1 P1.19 | length 2.4
  Top Layer w0.254: C8.1@68.81,21.34 C8.1@68.81,21.35 ; C8.1@69,21.3 P1.19
NetC9_1: C9.1 P1.20 | length 2.6
  Top Layer w0.254: C9.1@69,20.3 69,20.31 69.442,20.752 71.352,20.752 P1.20
NetC10_1: C10.1 P1.22 | length 2.6
  Top Layer w0.254: C10.1@69,19.3 69,19.31 69.442,19.752 71.352,19.752 P1.22
NetC13_2: C13.2 IC1.A1 P5.1 | length 4.2
  Top Layer w0.2: 69.709,34.821 69.775,34.821 69.971,34.625 IC1.A1
  Top Layer w0.4: P5.1 68.96,37.865 C13.2 68.96,36.39 69.709,35.641 69.709,34.821
NetC14_2: C14.2 IC1.B1 IC1.B2 L2.1 P6.2 | length 19.6
  Top Layer w0.2: IC1.B1 70.175,34.025 IC1.B2
  Top Layer w0.3: C14.2 70.175,34.025
  Top Layer w0.4: v2(65.404,43.375) 65.404,35.071 67.438,33.037 68.363,33.037 68.515,32.885 C14.2
  Bottom Layer w0.4: v2(65.404,43.375) 65.404,43.435 66.515,44.546 P6.2
NetC24_1: C24.1 IC4.A1 IC4.C1 P7.2 | length 6.4
  Top Layer w0.3: P7.2 59.35,51.8 59.78,52.23 C24.1 ; C24.1@61.133,52.017 IC4.A1
  Top Layer w0.4: P7.2 60.375,50.45 IC4.C1 ; C24.1 60.96,52.23 61.133,52.057 C24.1@61.133,52.017
NetIC1_A2: IC1.A2 L2.2 | length 3.4
  Top Layer w0.2: IC1.A2 70.375,35.009 70.6,35.234 v2(70.6,35.369)
  Top Layer w0.254: L2.2@68.673,34.627 v2(68.673,35.244)
  Bottom Layer w0.4: v2(68.673,35.244) 70.407,35.257 70.519,35.369 v2(70.6,35.369)
NetIC1_B3: IC1.B3 R3.2 R17.2 | length 2.9
  Top Layer w0.2: IC1.B3 70.9,34.1
  Top Layer w0.254: 70.9,34.1 71.175,33.825 71.175,32.95 R3.2 R17.2
NetIC3_A2: IC3.A2 P4.2 | length 3
  Top Layer w0.2: 68.075,13.056 IC3.A2
  Top Layer w0.254: 68.075,13.056 68.675,12.456 P4.2
NetIC4_C2: IC4.C2 P6.1 | length 4.4
  Top Layer w0.2: 62.185,50.19 62.185,50.228 62.2,50.243 IC4.C2
  Top Layer w0.254: 62.185,50.19 62.185,48.615 P6.1
NetLED1_1: LED1.1 R15.2 | length 2
  Top Layer w0.254: R15.2 LED1.1
NetLED2_1: LED2.1 R16.2 | length 1.7
  Top Layer w0.254: R16.2 LED2.1
NetP8_1: P8.1 U1.32 | length 2.6
  Top Layer w0.254: U1.32 79.769,44.4 79.969,44.2 81.185,44.2 P8.1 ; P8.1@81.173,44.162 P8.1@81.235,44.1
NetP9_2: P9.2 SuperCap1.1 SuperCap2.1 | length 9.3
  Top Layer w0.4: SuperCap1.1 47.596,46.039 P9.2 48.775,44.925 52.2,41.5 SuperCap2.1
NetR7_1: R7.1 Z1.2 | length 1.1
  Top Layer w0.254: Z1.2 R7.1
NFC_Vcc: C25.1 IC2.9 P8.2 R4.2 R5.2 | length 47.7
  Top Layer w0.2: IC2.9 52.575,49.3 v2@53.275,48.6
  Top Layer w0.254: v2(53.275,48.507) v2@53.275,48.6 ; v2@53.275,48.6 53.396,48.6 53.783,48.213 54.252,48.213 C25.1 ; P8.2 83.8,44.176 84.55,43.426 R5.2 R4.2
  Bottom Layer w0.254: v2@53.271,48.503 53.275,48.499 53.275,47.641 53.173,47.539 53.173,46.793 55.558,44.408 56.892,44.408 64.185,37.115 67.717,37.069 69.533,37.069 70.253,37.071 71.106,37.071 ccw(c71.165,38.2) 71.224,37.071 71.611,37.071 71.623,37.059 73.282,37.059 73.545,36.796 78.611,36.796 78.673,36.859 ; 78.674,36.859 78.834,36.934 81.625,39.725 81.625,42.1 P8.2
PREVGH: C5.2 D3.2 P1.21 | length 6.6
  Top Layer w0.254: P1.21@71.448,20.252 73.279,20.252 75.14,18.391 C5.2 75.12,17.28 75.12,16.253 D3.2
PREVGL: C11.1 D1.2 P1.23 | length 5.2
  Top Layer w0.254: P1.23@71.448,19.252 73.448,19.252 73.7,19 73.7,17.36 C11.1 73.78,17.28 73.78,16.253 D1.2
RES: P1.10 U1.11 | length 21.6
  Top Layer w0.254: P1.10 74.534,25.8 75.9,27.166 75.9,30.557 72.391,34.065 72.391,34.192 72.317,34.266 72.288,37.275 72.296,38.188 ccw(c71.165,38.2) 72.017,38.943 71.273,39.797 71.273,39.892 71.273,41.144 71.406,41.277 71.527,41.277 71.627,41.377 71.902,41.377 U1.11
RESE: P1.3 Q1.2 R2.2 | length 22.2
  Top Layer w0.154: Q1.2@76.973,14.275 77.096,14.275 77.121,14.3
  Top Layer w0.254: P1.3 74.144,29.3 74.344,29.1 v2(75.169,29.1) ; 77.121,14.3 R2.2 ; R2.2@78.775,14.275 79.025,14.525 v2(79.025,15.825)
  Bottom Layer w0.254: v2(75.169,29.1) 77.8,26.469 77.8,17.05 v2(79.025,15.825)
SCL1: IC2.7 R4.1 U1.30 | length 47.5
  Top Layer w0.2: 51.825,48.213 IC2.7
  Top Layer w0.254: v2(51.208,46.483) 51.293,46.568 51.293,47.202 51.825,47.734 51.825,48.213 ; U1.30 78.848,43.377 79.273,43.377 80.4,42.25 81.275,42.25 82.829,40.696 v2(82.829,40.681) ; v2@82.719,40.644 82.741,40.666 83.435,40.666 R4.1
  Bottom Layer w0.254: v2(51.208,46.483) 51.329,46.483 51.722,46.089 52.593,46.089 55.182,43.5 56.4,43.5 63.8,36.1 72.957,36.1 73.169,35.888 80.033,35.888 82.829,38.684 v2(82.829,40.681)
SCL2: IC4.C4 R12.1 U1.21 | length 26.1
  Top Layer w0.254: IC4.C4 63.208,50.442 63.663,50.442 64.029,50.075 v2(64.15,50.075) 64.2,50.125 65.325,50.125 R12.1 ; U1.21 76.625,39.459 76.507,39.341 76.507,38.527 v2(77.029,38.005)
  Bottom Layer w0.254: v2(64.15,50.075) 65.55,50.075 69.96,45.665 69.96,43.254 69.417,42.711 69.417,41.199 70.366,40.25 71.5,40.25 73.745,38.005 v2(77.029,38.005)
SCLK: P1.13 U1.15 | length 22.3
  Top Layer w0.254: P1.13@71.494,24.302 75.89,24.302 77.262,25.674 77.262,31.121 74.825,33.558 74.825,35.11 74.211,35.723 74.137,35.798 74.137,38.872 74.018,39.085 73.648,39.902 U1.15
SDA1: IC2.6 R5.1 U1.31 | length 46.6
  Top Layer w0.2: 51.371,48.308 51.415,48.352 IC2.6@51.415,48.708
  Top Layer w0.254: v2(50.85,47.8) 50.863,47.8 51.371,48.308 ; U1.31 78.84,43.885 79.415,43.885 80.525,42.775 81.829,42.775 82.391,42.212 ; 82.391,42.211 82.67,41.932 v2(82.67,41.888) ; v2@82.632,41.85 82.639,41.857 83.418,41.857 R5.1
  Bottom Layer w0.254: v2(50.85,47.8) 50.925,47.8 52.182,46.543 52.781,46.543 55.37,43.954 56.646,43.954 63.995,36.605 70.429,36.605 70.441,36.617 71.096,36.617 ccw(c71.165,38.2) 71.234,36.617 71.274,36.617 71.425,36.605 71.444,36.605 73.094,36.605 73.357,36.342 78.884,36.342 82.098,39.556 82.098,41.206 82.632,41.85 v2(82.67,41.888)
SDA2: IC4.C3 R10.1 U1.22 | length 28.5
  Top Layer w0.254: IC4.C3 62.7,49.559 63.175,49.084 v2(63.175,49) 63.2,49.025 64.175,49.025 R10.1 ; U1.22 77.125,39.234 77.238,39.121 v2(77.238,39)
  Bottom Layer w0.254: v2(63.175,49) 65.939,49 69.506,45.433 69.506,43.442 68.963,42.899 68.963,41.011 70.224,39.75 71.239,39.75 73.739,37.25 77.308,37.25 77.76,37.702 77.76,38.44 77.238,38.962 v2(77.238,39)
SDI: P1.14 U1.17 | length 23
  Top Layer w0.254: P1.14@71.448,23.848 73.067,23.848 73.108,23.807 76.037,23.807 77.716,25.486 77.716,31.309 75.279,33.746 75.279,35.298 74.591,35.986 74.591,39.771 74.602,39.782 74.602,40.177 U1.17
USART1_CTS: P2.2 U1.40 | length 6
  Top Layer w0.254: U1.40 76.625,48.554 77.145,49.074 78.49,50.419 P2.2
USART1_RTS_DE: P2.6 U1.39 | length 12.2
  Top Layer w0.254: U1.39 77.148,47.123 77.148,47.777 77.5,48.129 v2(77.5,48.25)
  Bottom Layer w0.254: P2.6 68.568,52.062 69.063,52.062 72.875,48.25 v2(77.5,48.25)
USART1_RX: P2.5 U1.43 | length 8.7
  Top Layer w0.254: P2.5 72.095,51.075 74.85,51.075 75.3,50.625 75.3,48.275 75.125,48.1 U1.43
USART1_TX: P2.4 U1.42 | length 6.7
  Top Layer w0.254: P2.4 73.526,52.184 74.386,52.184 75.775,50.795 75.775,48.108 75.625,47.958 U1.42
Vcap: D4.1 P4.1 P7.1 P9.1 R6.2 R8.2 U1.1 Z1.1 | length 68.2
  Top Layer w0.254: D4.1 58.865,49.1 P7.1 60.14,49.26 61.975,47.425 61.975,46.275 62.8,45.45 R8.2 ; R6.2 68.575,46.75 69.102,47.277 71.108,47.277 71.627,46.758 71.627,46.423 71.65,46.4 U1.1
  Top Layer w0.4: P9.1 51.325,45 Z1.1 53.45,45.55 53.946,46.046 54.283,46.046 55.7,47.463 D4.1 ; R8.2@62.75,44.65 R8.2 62.8,43.2 v2(63.575,42.425) 63.525,42.375 63.525,13.835 P4.1 ; v2(67.75,46.125) 67.807,46.182 67.907,46.182 68.475,46.75 R6.2
  Bottom Layer w0.4: v2(63.575,42.425) 63.632,42.482 65.944,42.482 67.115,43.653 67.115,45.416 67.75,46.051 v2(67.75,46.125)
VCOM: C12.1 P1.24 | length 0.8
  Top Layer w0.254: C12.1 P1.24@69.86,18.752
Vdd: C4.1 C19.1 C20.1 C21.1 C22.1 P1.15 P1.16 P2.3 R8.1 R9.2 R10.2 R11.1 R12.2 U1.24 U1.36 U1.48 | length 86.8
  Top Layer w0.254: v2(71.975,50.2) 71.975,50.081 72.215,49.841 C19.1 72.203,49.138 72.203,48.162 C21.1 72.19,48.14 72.602,47.728 72.602,47.123 U1.48 ; U1.24 78.125,39.925 78.148,39.902 78.473,39.902 78.937,39.438 78.937,39.148 C22.1 ; U1.36 79.1,46.4 79.123,46.423 79.123,46.698 79.385,46.96 C20.1 80.015,46.97 80.015,47.986 v2(80.005,47.996)
  Top Layer w0.4: R8.1 64.977,44.65 R9.2 ; R9.2@65.15,44.65 64.977,44.477 64.977,44.427 64.6,44.05 64.6,25.98 67.24,23.34 69,23.34 69.04,23.3 P1.15@69.6,23.3 ; R9.2 65.2,49 65.25,49.05 R10.2 65.35,49.05 R10.2@65.45,49.15 ; 66.025,49.775 66.025,49.751 65.849,49.575 65.825,49.575 65.45,49.2 R10.2@65.45,49.15 ; R11.1 66.437,51.988 R12.2@66.437,50.213 ; P1.16@69.765,22.825 69.765,23.135 69.67,23.23 P1.15@69.6,23.3 ; P1.15@71.4,23.28 76.255,23.28 79.11,26.135 C22.1 ; P1.15 69.765,23.3 P1.15@69.6,23.3 ; v2(71.975,50.2) 71.963,50.188 66.448,50.188 66.443,50.193 66.252,50.002 66.252,49.952 66.038,49.738 65.85,49.55 R10.2@65.45,49.15
  Bottom Layer w0.4: v2(71.975,50.2) v2@72.025,50.25 ; P2.3 75.758,52.3 74.362,50.904 72.679,50.904 v2@72.025,50.25 ; v2(80.005,47.996) 79.947,48.053 79.947,48.859 79.581,49.225 73.05,49.225 72.225,50.05 72.206,50.05 72.025,50.231 v2@72.025,50.25
Vref+: 
X1: IC4.A3 X1.1 | length 1.3
  Top Layer w0.254: X1.1 62.625,52.629 62.7,52.554 IC4.A3@62.7,51.462
X2: IC4.A2 X1.3 | length 2.2
  Top Layer w0.254: X1.3 62.175,53.229 62.173,53.227 62.056,53.227 61.823,52.994 61.823,52.406 62.2,52.029 IC4.A2
XTAL32IN: U1.3 X2.1 | length 1.7
  Top Layer w0.254: X2.1 70.306,45.221 70.485,45.4 U1.3
XTAL32OUT: U1.4 X2.3 | length 2
  Top Layer w0.254: X2.3 70.247,44.529 70.25,44.529 70.348,44.431 70.647,44.431 71.116,44.9 U1.4
pads on no net: ANT1. IC2.3 IC2.4 IC2.5 IC2.13 IC2.16 IC4.B2 IC4.B3 P1.1 P1.6 P1.7 U1.5 U1.6 U1.16 U1.20 U1.25 U1.29 U1.33 U1.38 U1.41 U1.45 U1.46 X1.4 X2.4
copper on no net:
  other v3: 36.7,45.66

## Polygon pours and split planes (outlines as drawn)
GND on Top Layer "GND_L01_P000" (solid, pour order 0): 44.7,54 44.7,44.3 63.3,34.727 63.3,0 86,0 86,54
GND on Bottom Layer "GND_L02_P001" (solid, pour order 1): 44.55,54 44.55,44.025 63.3,34.708 63.3,0 86,0 86,54

## Other copper
Top Layer:
  pour cut-out: 74.775,38.525 74.591,38.341 74.591,35.986 75.452,35.125 76.025,35.125 76.025,39.1 76.053,39.128
Bottom Layer:
  pour cut-out: 71.45,42.225 70.937,42.387 70.725,42.6 70.725,46.353 70.861,46.49 71.101,46.25 71.475,46.25 71.475,42.75 71.45,42.725

## Silkscreen, mask and mechanical layers (free items; w line width, h text height)
Top Overlay:
  text "RST" at 67.629,49.854 h0.72
  text "RX" at 70.279,49.854 h0.72
  text "Vdd" at 75.154,49.854 h0.72
  text "CTS" at 77.754,49.854 h0.72
  text "TX" at 72.654,49.829 h0.72
  text "GND" at 80.379,49.829 h0.72
Bottom Overlay:
  text "BOOT" at 82.646,50.304 h0.52
  text "SWCLK" at 82.621,49.029 h0.52
  text "SWDIO" at 82.646,46.579 h0.52
  text "Assar" at 32.496,28.779 h1.52
  text "V1. 2025-04-08" at 32.796,25.629 h1.52

## Text inside footprints (layer, text, board x,y; h text height)
SuperCap1: Top Overlay "-" at 58.904,43.342 h1.52; Top Overlay "+" at 41.354,45.3 h1.52
SuperCap2: Top Overlay "+" at 48.954,41.5 h1.52; Top Overlay "-" at 61.954,40.992 h1.52